# EAGLE board stereo_mix_back (EAGLE 9.4.2), part 1 of 3
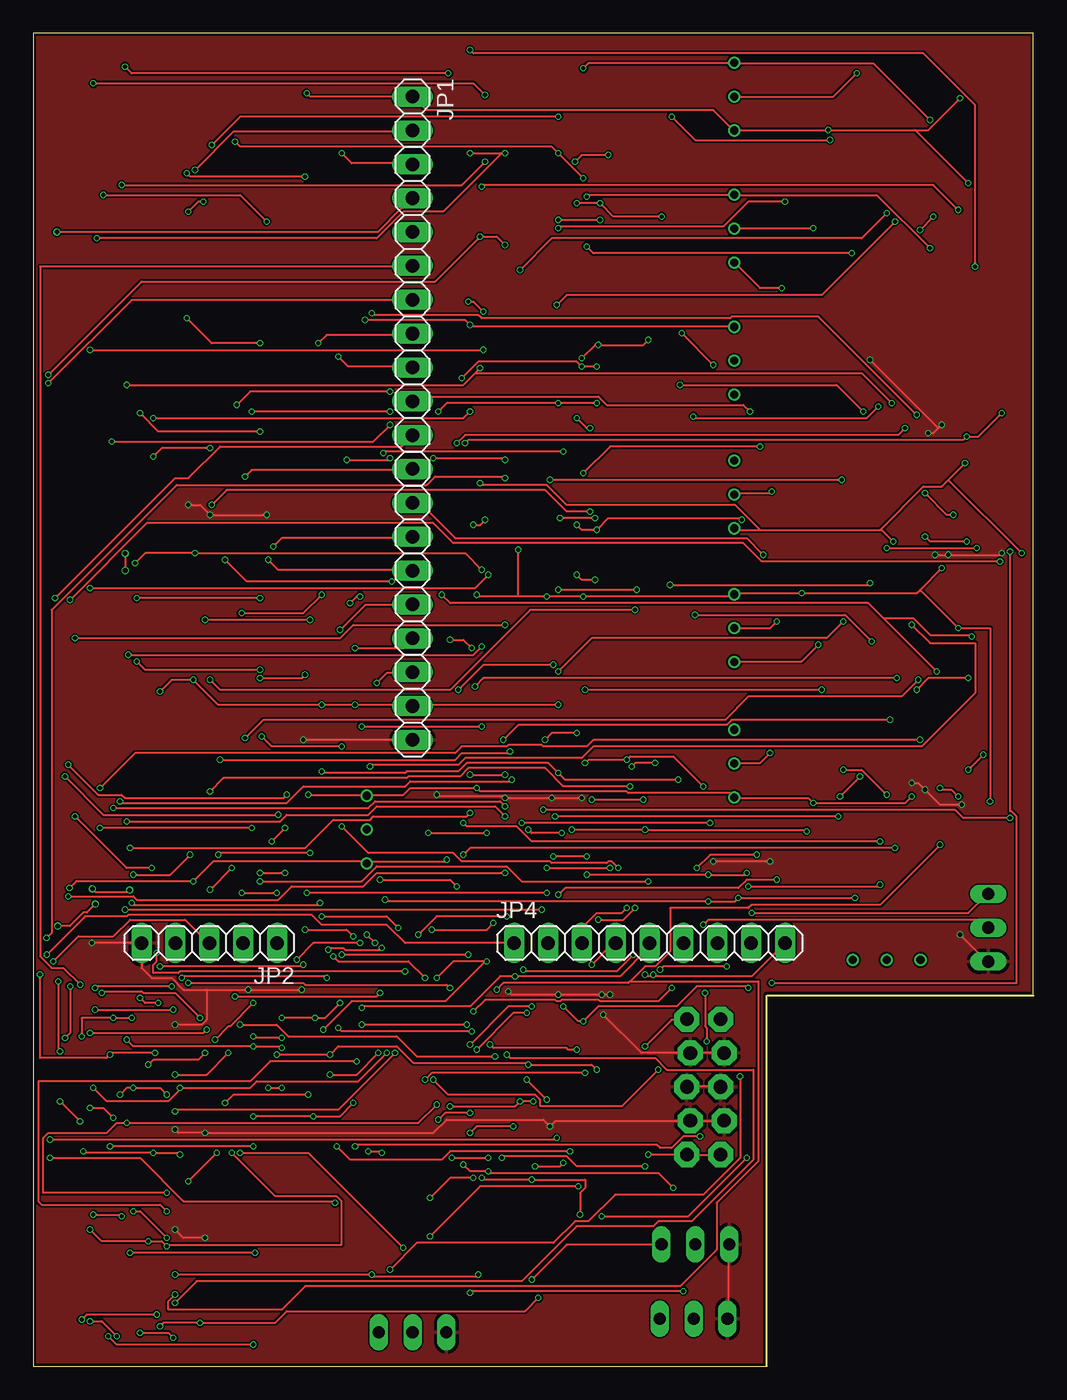
[diagram p0: board, top side]
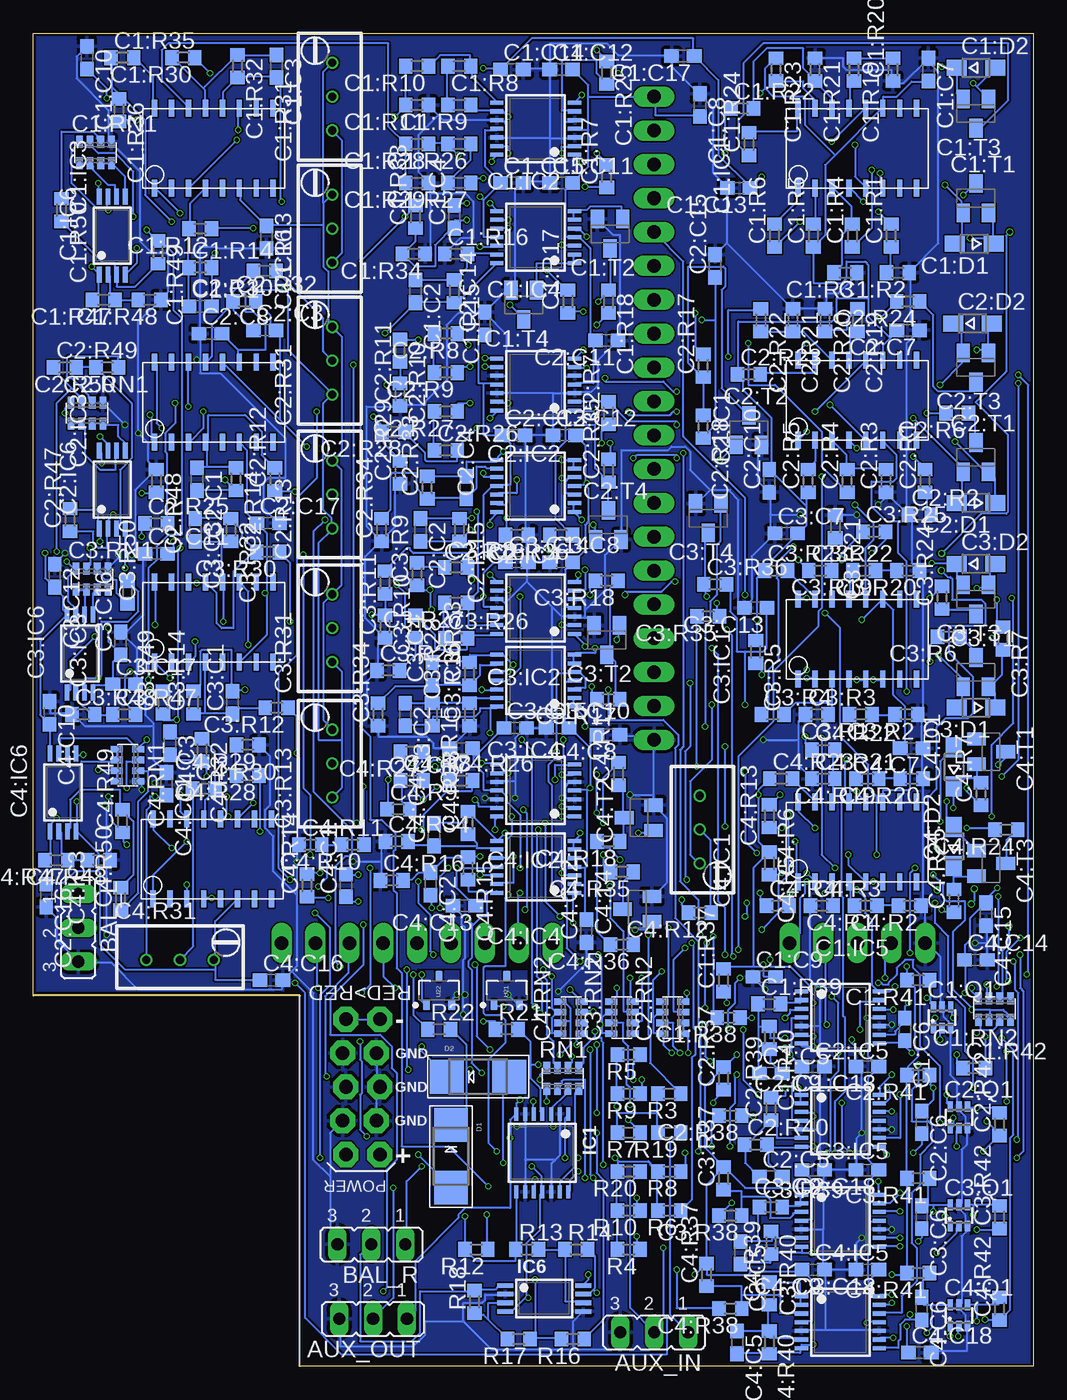
[diagram p1: board, bottom side, seen from below]

Size 75 x 100 mm. Coordinates in mm from the lower left corner, seen from the top.
Outline: 0,0 55.01,0 55.01,27.81 75,27.81 75,100 0,100 0,0
Copper layers (1*16): Top 0.035559375mm / dielectric 1.6mm / Bottom 0.035559375mm
Design rules "jlcpcb2layer *": minimum track width 6mil, minimum drill 12mil, track to track 5mil, track to pad 5mil, pad to pad 5mil, via to via 5mil, smd to smd 5mil, copper to edge 8mil, drill to drill 6mil, minimum pad ring 5mil, minimum via ring 3mil, stop-mask expansion 2.5mil, vias tented up to drill 16mil, thermal gap 10mil

## Footprints (pad centres in the part's own frame; a part is rotated, then mirrored left to right if it is on the bottom)
JP2 = drill 0.914 long: 1 -2.54,0; 2 0,0; 3 2.54,0
C0603 = smd 1.1 x 1: 1 -0.85,0; 2 0.85,0
SOD323-W = smd 1.5 x 1.2: A 1.45,0; C -1.45,0
DMP16 = smd 0.4 x 1.27: P$1 0,0; P$2 1.27,0; P$3 2.54,0; P$4 3.81,0; P$5 5.08,0; P$6 6.35,0; P$7 7.62,0; P$8 8.89,0; P$9 8.89,6; P$10 7.62,6; P$11 6.35,6; P$12 5.08,6; P$13 3.81,6; P$14 2.54,6; P$15 1.27,6; P$16 0,6
TSSOP14 = smd 0.305 x 0.991: 1 -1.95,-2.918; 2 -1.3,-2.918; 3 -0.65,-2.918; 4 0,-2.918; 5 0.65,-2.918; 6 1.3,-2.918; 7 1.95,-2.918; 8 1.95,2.918; 9 1.3,2.918; 10 0.65,2.918; 11 0,2.918; 12 -0.65,2.918; 13 -1.3,2.918; 14 -1.95,2.918
TSSOP8 = smd 0.35 x 1.2: 1 -0.975,-2.925; 2 -0.325,-2.925; 3 0.325,-2.925; 4 0.975,-2.925; 5 0.975,2.925; 6 0.325,2.925; 7 -0.325,2.925; 8 -0.975,2.925
SOT363_PHILIPS = smd 0.4 x 0.8: 1 -0.65,-0.8; 2 0,-0.8; 3 0.65,-0.8; 4 0.65,0.8; 5 0,0.8; 6 -0.65,0.8
R0603 = smd 1 x 1.1: 1 -0.85,0; 2 0.85,0
RTRIMT93YA = drill 0.61: 1 0,-2.54; 2 0,0; 3 0,2.54
CTS742C083 = smd 0.5 x 0.9: 1 -1.2,-0.8; 2 -0.4,-0.8; 3 0.4,-0.8; 4 1.2,-0.8; 5 1.2,0.8; 6 0.4,0.8; 7 -0.4,0.8; 8 -1.2,0.8
SOT23-BEC = smd 1 x 1.4: B -0.95,-1.1; C 0,1.1; E 0.95,-1.1
EURO_PWR_HEADER_LOCK = drill 1.016 pad 1.88 octagon: GND1 -2.54,1.143; GND2 -2.54,-1.397; GND3 0,1.397; GND4 0,-1.143; GND5 2.54,1.143; GND6 2.54,-1.397; NEG1 -5.08,1.397; NEG2 -5.08,-1.143; POS1 5.08,1.397; POS2 5.08,-1.143
SMADIODE = smd 2.54 x 2.54: A 2.349,0; C -2.349,0
1X20 = drill 1.016 long: 1 -24.13,0; 2 -21.59,0; 3 -19.05,0; 4 -16.51,0; 5 -13.97,0; 6 -11.43,0; 7 -8.89,0; 8 -6.35,0; 9 -3.81,0; 10 -1.27,0; 11 1.27,0; 12 3.81,0; 13 6.35,0; 14 8.89,0; 15 11.43,0; 16 13.97,0; 17 16.51,0; 18 19.05,0; 19 21.59,0; 20 24.13,0
1X05 = drill 1.016 long: 1 -5.08,0; 2 -2.54,0; 3 0,0; 4 2.54,0; 5 5.08,0
1X09 = drill 1.016 long: 1 -10.16,0; 2 -7.62,0; 3 -5.08,0; 4 -2.54,0; 5 0,0; 6 2.54,0; 7 5.08,0; 8 7.62,0; 9 10.16,0
TEXAS_INSTRUMENTS_LM4040C5IDBZR_0 = smd 0.8 x 0.55: 1 -1.1,0.95; 2 -1.1,-0.95; 3 1.1,0

## Placement (x,y rotation side)
AUX_IN  [JP2]  28.44,2.54 180 bottom
AUX_OUT  [JP2]  49.52,3.56 180 bottom
BAL_L  [JP2]  71.62,32.89 270 bottom
BAL_R  [JP2]  49.65,9.14 180 bottom
C1:C1  100pF  [C0603]  62.48,79.5 0 bottom
C1:C2  22pF  [C0603]  46.35,80.64 270 bottom
C1:C3  100pF  [C0603]  56.76,97.54 270 bottom
C1:C4  22pF  [C0603]  43.43,86.23 90 bottom
C1:C5  100pF  [C0603]  19.68,21.97 0 bottom
C1:C6  100pF  [C0603]  9.64,25.27 270 bottom
C1:C7  100nF  [C0603]  7.87,97.28 270 bottom
C1:C8  100nF  [C0603]  25.01,94.61 270 bottom
C1:C9  100nF  [C0603]  20.18,29.21 0 bottom
C1:C10  100nF  [C0603]  70.98,98.17 270 bottom
C1:C11  100nF  [C0603]  35.42,88.77 0 bottom
C1:C12  100nF  [C0603]  35.42,97.28 0 bottom
C1:C13  100nF  [C0603]  22.09,88.39 180 bottom
C1:C14  100nF  [C0603]  39.11,97.28 0 bottom
C1:C15  100nF  [C0603]  39.11,88.77 0 bottom
C1:C16  100nF  [C0603]  57.52,84.71 270 bottom
C1:C17  100nF  [C0603]  26.28,98.3 180 bottom
C1:C18  100nF  [C0603]  12.44,22.48 180 bottom
C1:D1  1N4148  [SOD323-W]  4.44,84.2 180 bottom
C1:D2  1N4148  [SOD323-W]  4.31,97.41 0 bottom
C1:IC1  LM13700  [DMP16]  17.64,88.39 0 bottom
C1:IC2  TL084PW  [TSSOP14]  37.33,92.84 90 bottom
C1:IC3  LM13700  [DMP16]  65.91,88.39 0 bottom
C1:IC4  TL084PW  [TSSOP14]  37.33,84.71 90 bottom
C1:IC5  TL084PW  [TSSOP14]  14.47,26.16 270 bottom
C1:IC6  TL082PW  [TSSOP8]  69.08,84.84 0 bottom
C1:Q1  BC847BS  [SOT363_PHILIPS]  6.85,26.16 0 bottom
C1:R1  22  [R0603]  10.66,84.84 90 bottom
C1:R2  470  [R0603]  10.15,82.04 180 bottom
C1:R3  510  [R0603]  14.09,82.04 180 bottom
C1:R4  21k  [R0603]  13.58,84.84 90 bottom
C1:R5  12k  [R0603]  16.5,84.84 90 bottom
C1:R6  7k2  [R0603]  19.42,84.84 90 bottom
C1:R7  6k8  [R0603]  32,89.28 90 bottom
C1:R8  560  [R0603]  43.05,97.54 0 bottom
C1:R9  15k  [R0603]  43.05,94.61 180 bottom
C1:R10  100k  [R0603]  46.22,97.54 180 bottom
C1:R11  680  [R0603]  46.22,94.61 180 bottom
C1:R12  1M  [R0603]  62.48,85.34 180 bottom
C1:R13  100k  [RTRIMT93YA]  52.57,85.34 0 bottom
C1:R14  47k  [R0603]  62.48,82.42 0 bottom
C1:R15  100k  [R0603]  43.43,80.64 270 bottom
C1:R16  68k  [R0603]  43.3,83.44 0 bottom
C1:R17  15k  [R0603]  34.92,79.88 90 bottom
C1:R18  680k  [R0603]  31.87,79.88 270 bottom
C1:R19  22  [R0603]  13.45,97.28 270 bottom
C1:R20  470  [R0603]  10.53,97.28 90 bottom
C1:R21  510  [R0603]  16.38,97.28 270 bottom
C1:R22  21k  [R0603]  21.84,94.36 0 bottom
C1:R23  12k  [R0603]  19.3,97.28 270 bottom
C1:R24  7k2  [R0603]  21.33,91.69 90 bottom
C1:R25  6k8  [R0603]  32,97.03 270 bottom
C1:R26  560  [R0603]  43.05,91.69 180 bottom
C1:R27  15k  [R0603]  43.05,88.77 180 bottom
C1:R28  100k  [R0603]  46.22,91.69 180 bottom
C1:R29  680  [R0603]  46.22,88.77 180 bottom
C1:R30  1M  [R0603]  63.75,98.17 180 bottom
C1:R31  100k  [RTRIMT93YA]  52.57,95.25 0 bottom
C1:R32  47k  [R0603]  59.68,97.54 270 bottom
C1:R33  100k  [R0603]  46.35,86.23 90 bottom
C1:R34  68k  [R0603]  46.47,83.44 180 bottom
C1:R35  15k  [R0603]  68.32,98.17 0 bottom
C1:R36  680k  [R0603]  68.57,94.23 270 bottom
C1:R37  1M  [R0603]  23.23,28.96 90 bottom
C1:R38  1k  [R0603]  22.85,26.16 180 bottom
C1:R39  1M  [R0603]  19.8,27.18 0 bottom
C1:R40  10k  [R0603]  19.8,24.64 270 bottom
C1:R41  10M  [R0603]  8.63,28.96 180 bottom
C1:R42  1k5  [R0603]  4.44,22.35 0 bottom
C1:R47  200k  [R0603]  69.72,80.01 180 bottom
C1:R48  200k  [R0603]  66.29,80.01 180 bottom
C1:R49  100k  [R0603]  65.65,83.57 270 bottom
C1:R50  100k  [R0603]  72.89,86.74 270 bottom
C1:RN1  CTS742C083  [CTS742C083]  70.35,91.06 0 bottom
C1:RN2  CTS742C083  [CTS742C083]  2.91,26.8 180 bottom
C1:T1  3906  [SOT23-BEC]  4.31,87.63 0 bottom
C1:T2  3906  [SOT23-BEC]  31.74,84.96 180 bottom
C1:T3  3906  [SOT23-BEC]  4.31,93.98 180 bottom
C1:T4  3906  [SOT23-BEC]  38.22,79.63 180 bottom
C2:C1  100pF  [C0603]  62.73,66.55 270 bottom
C2:C2  22pF  [C0603]  45.97,62.74 270 bottom
C2:C3  100pF  [C0603]  57.65,77.72 0 bottom
C2:C4  22pF  [C0603]  42.54,65.91 90 bottom
C2:C5  100pF  [C0603]  19.68,14.22 0 bottom
C2:C6  100pF  [C0603]  8.37,18.29 270 bottom
C2:C7  100nF  [C0603]  9.39,77.72 180 bottom
C2:C8  100nF  [C0603]  61.71,77.47 0 bottom
C2:C9  100nF  [C0603]  16.5,22.48 180 bottom
C2:C10  100nF  [C0603]  19.8,66.42 90 bottom
C2:C11  100nF  [C0603]  32,76.96 180 bottom
C2:C12  100nF  [C0603]  35.17,69.85 0 bottom
C2:C13  100nF  [C0603]  38.98,69.85 0 bottom
C2:C14  100nF  [C0603]  41.14,78.23 90 bottom
C2:C15  100nF  [C0603]  23.87,82.55 90 bottom
C2:C16  100nF  [C0603]  74.03,35.31 270 bottom
C2:C17  100nF  [C0603]  57.4,63.25 0 bottom
C2:C18  100nF  [C0603]  12.44,14.73 180 bottom
C2:D1  1N4148  [SOD323-W]  4.31,64.77 180 bottom
C2:D2  1N4148  [SOD323-W]  4.56,78.23 0 bottom
C2:IC1  LM13700  [DMP16]  17.64,69.47 0 bottom
C2:IC2  TL084PW  [TSSOP14]  37.33,73.66 90 bottom
C2:IC3  LM13700  [DMP16]  65.91,69.34 0 bottom
C2:IC4  TL084PW  [TSSOP14]  37.33,66.04 90 bottom
C2:IC5  TL084PW  [TSSOP14]  14.47,18.41 270 bottom
C2:IC6  TL082PW  [TSSOP8]  69.08,65.79 0 bottom
C2:Q1  BC847BS  [SOT363_PHILIPS]  5.58,18.67 0 bottom
C2:R1  22  [R0603]  8.12,66.42 90 bottom
C2:R2  470  [R0603]  8.5,63.88 0 bottom
C2:R3  510  [R0603]  11.04,66.42 90 bottom
C2:R4  21k  [R0603]  13.96,66.42 90 bottom
C2:R5  12k  [R0603]  16.88,66.42 90 bottom
C2:R6  7k2  [R0603]  5.71,71.5 180 bottom
C2:R7  6k8  [R0603]  31.87,71.5 90 bottom
C2:R8  560  [R0603]  44.06,77.47 0 bottom
C2:R9  15k  [R0603]  44.06,74.55 180 bottom
C2:R10  100k  [R0603]  47.49,76.2 270 bottom
C2:R11  680  [R0603]  47.49,72.9 90 bottom
C2:R12  1M  [R0603]  56.89,66.55 90 bottom
C2:R13  100k  [RTRIMT93YA]  52.57,65.41 0 bottom
C2:R14  47k  [R0603]  59.81,66.55 270 bottom
C2:R15  100k  [R0603]  43.05,62.74 270 bottom
C2:R16  68k  [R0603]  38.73,62.36 180 bottom
C2:R17  15k  [R0603]  24.76,75.06 90 bottom
C2:R18  680k  [R0603]  24.76,70.48 270 bottom
C2:R19  22  [R0603]  13.2,78.49 270 bottom
C2:R20  470  [R0603]  15.61,78.49 270 bottom
C2:R21  510  [R0603]  18.03,78.49 270 bottom
C2:R22  21k  [R0603]  20.44,78.49 270 bottom
C2:R23  12k  [R0603]  21.33,74.42 0 bottom
C2:R24  7k2  [R0603]  9.39,79.88 180 bottom
C2:R25  6k8  [R0603]  65.78,63.25 0 bottom
C2:R26  560  [R0603]  44.06,68.71 0 bottom
C2:R27  15k  [R0603]  44.06,71.63 180 bottom
C2:R28  100k  [R0603]  48,70.1 180 bottom
C2:R29  680  [R0603]  47.49,67.06 90 bottom
C2:R30  1M  [R0603]  57.65,82.17 180 bottom
C2:R31  100k  [RTRIMT93YA]  52.57,75.44 0 bottom
C2:R32  47k  [R0603]  59.17,79.88 0 bottom
C2:R33  100k  [R0603]  45.46,65.91 90 bottom
C2:R34  68k  [R0603]  48.89,62.74 90 bottom
C2:R35  15k  [R0603]  31.87,67.18 90 bottom
C2:R36  680k  [R0603]  35.42,62.36 180 bottom
C2:R37  1M  [R0603]  23.23,21.59 90 bottom
C2:R38  1k  [R0603]  22.73,18.8 180 bottom
C2:R39  1M  [R0603]  19.68,19.3 90 bottom
C2:R40  10k  [R0603]  20.82,16.64 0 bottom
C2:R41  10M  [R0603]  8.63,21.84 180 bottom
C2:R42  1k5  [R0603]  2.53,18.16 90 bottom
C2:R47  200k  [R0603]  72.25,63.5 90 bottom
C2:R48  200k  [R0603]  65.78,66.42 270 bottom
C2:R49  100k  [R0603]  72.64,74.93 0 bottom
C2:R50  100k  [R0603]  69.46,74.93 180 bottom
C2:RN1  CTS742C083  [CTS742C083]  70.98,71.5 0 bottom
C2:RN2  CTS742C083  [CTS742C083]  27.04,26.16 90 bottom
C2:T1  3906  [SOT23-BEC]  4.31,68.2 0 bottom
C2:T2  3906  [SOT23-BEC]  21.33,70.23 0 bottom
C2:T3  3906  [SOT23-BEC]  4.31,74.93 180 bottom
C2:T4  3906  [SOT23-BEC]  31.87,63.12 0 bottom
C3:C1  100pF  [C0603]  60.06,49.78 90 bottom
C3:C2  22pF  [C0603]  47.11,48.9 270 bottom
C3:C3  100pF  [C0603]  62.86,62.74 270 bottom
C3:C4  22pF  [C0603]  45.08,51.94 90 bottom
C3:C5  100pF  [C0603]  21.96,8.51 270 bottom
C3:C6  100pF  [C0603]  8.37,11.18 270 bottom
C3:C7  100nF  [C0603]  18.53,62.48 0 bottom
C3:C8  100nF  [C0603]  35.42,60.33 0 bottom
C3:C9  100nF  [C0603]  16.5,14.73 180 bottom
C3:C10  100nF  [C0603]  35.68,47.88 0 bottom
C3:C11  100nF  [C0603]  65.78,60.96 0 bottom
C3:C12  100nF  [C0603]  73.4,59.31 270 bottom
C3:C13  100nF  [C0603]  20.82,56.9 180 bottom
C3:C14  100nF  [C0603]  38.73,60.33 0 bottom
C3:C15  100nF  [C0603]  38.85,47.88 0 bottom
C3:C16  100nF  [C0603]  68.44,54.23 90 bottom
C3:C17  100nF  [C0603]  68.19,51.18 0 bottom
C3:C18  100nF  [C0603]  12.44,7.24 180 bottom
C3:D1  1N4148  [SOD323-W]  4.31,49.4 180 bottom
C3:D2  1N4148  [SOD323-W]  4.31,60.2 0 bottom
C3:IC1  LM13700  [DMP16]  17.64,51.56 0 bottom
C3:IC2  TL084PW  [TSSOP14]  37.33,56.9 90 bottom
C3:IC3  LM13700  [DMP16]  65.91,52.83 0 bottom
C3:IC4  TL084PW  [TSSOP14]  37.33,51.44 90 bottom
C3:IC5  TL084PW  [TSSOP14]  14.47,10.92 270 bottom
C3:IC6  TL082PW  [TSSOP8]  71.49,53.47 0 bottom
C3:Q1  BC847BS  [SOT363_PHILIPS]  5.58,11.3 0 bottom
C3:R1  22  [R0603]  12.95,48.9 180 bottom
C3:R2  470  [R0603]  9.52,48.9 180 bottom
C3:R3  510  [R0603]  16.25,48.9 0 bottom
C3:R4  21k  [R0603]  19.55,48.9 0 bottom
C3:R5  12k  [R0603]  20.82,53.59 270 bottom
C3:R6  7k2  [R0603]  6.34,54.74 180 bottom
C3:R7  6k8  [R0603]  2.28,54.61 270 bottom
C3:R8  560  [R0603]  43.3,59.94 0 bottom
C3:R9  15k  [R0603]  46.22,59.44 90 bottom
C3:R10  100k  [R0603]  48.63,58.8 270 bottom
C3:R11  680  [R0603]  48.63,55.5 90 bottom
C3:R12  1M  [R0603]  56.76,49.4 180 bottom
C3:R13  100k  [RTRIMT93YA]  52.57,45.21 0 bottom
C3:R14  47k  [R0603]  62.98,49.78 90 bottom
C3:R15  100k  [R0603]  45.08,48.9 270 bottom
C3:R16  68k  [R0603]  42.28,48.9 90 bottom
C3:R17  15k  [R0603]  31.87,50.04 180 bottom
C3:R18  680k  [R0603]  32,58.93 180 bottom
C3:R19  22  [R0603]  12.69,59.69 180 bottom
C3:R20  470  [R0603]  9.39,59.69 180 bottom
C3:R21  510  [R0603]  14.85,62.99 270 bottom
C3:R22  21k  [R0603]  15.99,59.69 0 bottom
C3:R23  12k  [R0603]  19.3,59.69 0 bottom
C3:R24  7k2  [R0603]  6.85,57.66 90 bottom
C3:R25  6k8  [R0603]  11.93,62.61 0 bottom
C3:R26  560  [R0603]  43.3,54.61 0 bottom
C3:R27  15k  [R0603]  43.3,57.28 180 bottom
C3:R28  100k  [R0603]  46.35,55.5 270 bottom
C3:R29  680  [R0603]  48.38,52.2 0 bottom
C3:R30  1M  [R0603]  57.4,61.09 180 bottom
C3:R31  100k  [RTRIMT93YA]  52.57,55.37 0 bottom
C3:R32  47k  [R0603]  60.19,62.74 270 bottom
C3:R33  100k  [R0603]  42.28,51.94 90 bottom
C3:R34  68k  [R0603]  49.14,48.9 90 bottom
C3:R35  15k  [R0603]  24.38,56.26 180 bottom
C3:R36  680k  [R0603]  23.87,58.67 0 bottom
C3:R37  1M  [R0603]  23.23,14.1 90 bottom
C3:R38  1k  [R0603]  22.73,11.3 180 bottom
C3:R39  1M  [R0603]  19.68,11.94 0 bottom
C3:R40  10k  [R0603]  19.68,9.27 270 bottom
C3:R41  10M  [R0603]  8.63,14.1 180 bottom
C3:R42  1k5  [R0603]  2.53,11.18 90 bottom
C3:R47  200k  [R0603]  68.19,48.9 0 bottom
C3:R48  200k  [R0603]  71.24,48.9 0 bottom
C3:R49  100k  [R0603]  65.27,49.78 90 bottom
C3:R50  100k  [R0603]  67.94,58.04 90 bottom
C3:RN1  CTS742C083  [CTS742C083]  70.6,59.05 0 bottom
C3:RN2  CTS742C083  [CTS742C083]  30.85,26.16 90 bottom
C3:T1  3906  [SOT23-BEC]  4.31,52.07 0 bottom
C3:T2  3906  [SOT23-BEC]  32,54.48 180 bottom
C3:T3  3906  [SOT23-BEC]  4.31,57.53 180 bottom
C3:T4  3906  [SOT23-BEC]  24.38,63.63 180 bottom
C4:C1  100pF  [C0603]  51.55,36.07 90 bottom
C4:C2  22pF  [C0603]  45.2,36.2 270 bottom
C4:C3  100pF  [C0603]  64.76,46.74 270 bottom
C4:C4  22pF  [C0603]  44.95,39.88 90 bottom
C4:C5  100pF  [C0603]  22.22,1.78 270 bottom
C4:C6  100pF  [C0603]  8.37,4.32 270 bottom
C4:C7  100nF  [C0603]  9.14,46.35 180 bottom
C4:C8  100nF  [C0603]  31.87,47.37 180 bottom
C4:C9  100nF  [C0603]  16.5,7.24 180 bottom
C4:C10  100nF  [C0603]  73.78,49.02 270 bottom
C4:C11  100nF  [C0603]  65.02,43.69 270 bottom
C4:C12  100nF  [C0603]  33.52,32.64 90 bottom
C4:C13  100nF  [C0603]  42.66,34.54 180 bottom
C4:C14  100nF  [C0603]  4.31,30.48 0 bottom
C4:C15  100nF  [C0603]  3.55,33.91 270 bottom
C4:C16  100nF  [C0603]  57.14,28.96 0 bottom
C4:C17  100nF  [C0603]  42.92,46.35 180 bottom
C4:C18  100nF  [C0603]  8.5,1.02 0 bottom
C4:D1  1N4148  [SOD323-W]  5.96,44.96 90 bottom
C4:D2  1N4148  [SOD323-W]  5.96,38.99 90 bottom
C4:IC1  LM13700  [DMP16]  17.64,36.32 0 bottom
C4:IC2  TL084PW  [TSSOP14]  37.33,43.18 90 bottom
C4:IC3  LM13700  [DMP16]  66.03,35.05 0 bottom
C4:IC4  TL084PW  [TSSOP14]  37.33,37.47 90 bottom
C4:IC5  TL084PW  [TSSOP14]  14.47,3.3 270 bottom
C4:IC6  TL082PW  [TSSOP8]  72.76,43.05 0 bottom
C4:Q1  BC847BS  [SOT363_PHILIPS]  5.58,3.81 0 bottom
C4:R1  22  [R0603]  12.56,34.54 180 bottom
C4:R2  470  [R0603]  9.26,34.54 180 bottom
C4:R3  510  [R0603]  15.87,34.54 0 bottom
C4:R4  21k  [R0603]  19.17,34.54 0 bottom
C4:R5  12k  [R0603]  19.8,37.72 270 bottom
C4:R6  7k2  [R0603]  19.8,41.27 270 bottom
C4:R7  6k8  [R0603]  3.93,42.93 90 bottom
C4:R8  560  [R0603]  46.6,43.94 0 bottom
C4:R9  15k  [R0603]  47.62,41.78 0 bottom
C4:R10  100k  [R0603]  51.05,39.12 180 bottom
C4:R11  680  [R0603]  54.22,39.12 0 bottom
C4:R12  1M  [R0603]  25.01,34.04 180 bottom
C4:R13  100k  [RTRIMT93YA]  25.01,40.26 180 bottom
C4:R14  47k  [R0603]  54.48,36.07 90 bottom
C4:R15  100k  [R0603]  42.41,37.34 270 bottom
C4:R16  68k  [R0603]  48.12,36.45 0 bottom
C4:R17  15k  [R0603]  31.11,44.45 90 bottom
C4:R18  680k  [R0603]  31.87,39.37 180 bottom
C4:R19  22  [R0603]  12.44,44.07 180 bottom
C4:R20  470  [R0603]  9.14,44.07 180 bottom
C4:R21  510  [R0603]  15.74,44.07 0 bottom
C4:R22  21k  [R0603]  15.74,46.23 0 bottom
C4:R23  12k  [R0603]  18.91,44.07 0 bottom
C4:R24  7k2  [R0603]  2.02,40.26 180 bottom
C4:R25  6k8  [R0603]  5.96,34.92 90 bottom
C4:R26  560  [R0603]  42.92,43.94 0 bottom
C4:R27  15k  [R0603]  46.6,46.1 180 bottom
C4:R28  100k  [R0603]  58.92,44.32 180 bottom
C4:R29  680  [R0603]  58.92,46.61 180 bottom
C4:R30  1M  [R0603]  62.22,43.31 0 bottom
C4:R31  100k  [RTRIMT93YA]  64,30.48 270 bottom
C4:R32  47k  [R0603]  62.35,46.23 270 bottom
C4:R33  100k  [R0603]  42.41,40.77 90 bottom
C4:R34  68k  [R0603]  47.74,39.37 0 bottom
C4:R35  15k  [R0603]  30.85,37.08 180 bottom
C4:R36  680k  [R0603]  30.85,31.62 180 bottom
C4:R37  1M  [R0603]  24.5,6.86 90 bottom
C4:R38  1k  [R0603]  22.73,4.32 180 bottom
C4:R39  1M  [R0603]  19.8,5.46 90 bottom
C4:R40  10k  [R0603]  19.8,1.78 270 bottom
C4:R41  10M  [R0603]  8.63,6.99 180 bottom
C4:R42  1k5  [R0603]  2.53,4.32 90 bottom
C4:R47  200k  [R0603]  73.27,37.97 180 bottom
C4:R48  200k  [R0603]  70.1,37.97 180 bottom
C4:R49  100k  [R0603]  68.32,40.89 90 bottom
C4:R50  100k  [R0603]  68.44,35.05 90 bottom
C4:RN1  CTS742C083  [CTS742C083]  67.94,45.09 270 bottom
C4:RN2  CTS742C083  [CTS742C083]  34.66,26.16 90 bottom
C4:T1  3906  [SOT23-BEC]  3.17,46.1 270 bottom
C4:T2  3906  [SOT23-BEC]  29.58,41.15 90 bottom
C4:T3  3906  [SOT23-BEC]  3.17,37.72 270 bottom
C4:T4  3906  [SOT23-BEC]  29.71,34.29 90 bottom
C5  EURO_POWER_LOCKFAT-LOCK  [EURO_PWR_HEADER_LOCK]  50.41,20.95 270 bottom
D1  1N4001  [SMADIODE]  43.68,15.75 270 bottom
D2  1N4001  [SMADIODE]  41.65,21.72 0 bottom
IC1  TL084PW  [TSSOP14]  36.82,16 180 bottom
IC6  TL082PW  [TSSOP8]  36.7,5.08 270 bottom
JP1  [1X20]  28.44,71.12 270 top
JP2  [1X05]  13.2,31.75 180 top
JP4  [1X09]  46.22,31.75 0 top
R3  100k  [R0603]  27.3,20.45 180 bottom
R4  100k  [R0603]  30.34,8.76 180 bottom
R5  100k  [R0603]  30.34,23.37 180 bottom
R6  100k  [R0603]  27.3,11.68 180 bottom
R7  100k  [R0603]  30.34,17.53 180 bottom
R8  100k  [R0603]  27.3,14.61 180 bottom
R9  100k  [R0603]  30.34,20.45 180 bottom
R10  100k  [R0603]  30.34,11.68 180 bottom
R12  24k  [R0603]  41.77,8.76 180 bottom
R13  100k  [R0603]  37.97,8.76 0 bottom
R14  100k  [R0603]  34.28,8.76 0 bottom
R16  24k  [R0603]  34.54,2.03 180 bottom
R17  100k  [R0603]  38.6,2.03 180 bottom
R18  100k  [R0603]  41.9,4.83 90 bottom
R19  100k  [R0603]  27.3,17.53 180 bottom
R20  100k  [R0603]  30.34,14.61 180 bottom
R21  [R0603]  39.49,25.27 0 bottom
R22  680R  [R0603]  44.57,25.27 0 bottom
RN1  CTS742C083  [CTS742C083]  35.3,21.59 0 bottom
U21  TEXAS_INSTRUMENTS_LM4040C5IDBZR  [TEXAS_INSTRUMENTS_LM4040C5IDBZR_0]  39.49,28.19 90 bottom
U22  TEXAS_INSTRUMENTS_LM4040C10IDBZR  [TEXAS_INSTRUMENTS_LM4040C5IDBZR_0]  44.57,28.19 90 bottom

## Library data of the parts
AUX_IN AUX_OUT BAL_L BAL_R = jumper
C1:C1-C1:C18 C2:C1-C2:C18 C3:C1-C3:C18 C4:C1-C4:C18 = rcl; SPICEPREFIX: C
C1:D1 C1:D2 C2:D1 C2:D2 C3:D1 C3:D2 C4:D1 C4:D2 = diode
C1:IC1 C1:IC3 C2:IC1 C2:IC3 C3:IC1 C3:IC3 C4:IC1 C4:IC3 = ota
C1:IC2 C1:IC4-C1:IC6 C2:IC2 C2:IC4-C2:IC6 C3:IC2 C3:IC4-C3:IC6 C4:IC2 C4:IC4-C4:IC6 IC1 IC6 = op-amp
C1:Q1 C2:Q1 C3:Q1 C4:Q1 = transistor-small-signal
C1:R1-C1:R12 C1:R14-C1:R30 C1:R32-C1:R42 C1:R47-C1:R50 C2:R1-C2:R12 C2:R14-C2:R30 C2:R32-C2:R42 C2:R47-C2:R50 C3:R1-C3:R12 C3:R14-C3:R30 C3:R32-C3:R42 C3:R47-C3:R50 C4:R1-C4:R12 C4:R14-C4:R30 C4:R32-C4:R42 C4:R47-C4:R50 R3-R10 R12-R14 R16-R22 = rcl; SPICEPREFIX: R
C1:R13 C1:R31 C2:R13 C2:R31 C3:R13 C3:R31 C4:R13 C4:R31 = rcl; SPICEMODEL: X; SPICEPREFIXL: POT
C1:RN1 C1:RN2 C2:RN1 C2:RN2 C3:RN1 C3:RN2 C4:RN1 C4:RN2 RN1 = resistor-net; OC_FARNELL: unknown; OC_NEWARK: unknown
C1:T1-C1:T4 C2:T1-C2:T4 C3:T1-C3:T4 C4:T1-C4:T4 = transistor-neu-to92
C5 = MusicThingModular
D1 D2 = adafruit
JP1 JP2 JP4 = pinhead
U21 U22 = lm4040

## Nets
1_IN_L: C1:R4.1 JP1.2
1_IN_R: C1:R22.1 JP1.3
1_PAN_ATT_R: C1:RN2.3 JP1.6
1_PAN_ATT_W: C1:IC5.12 C1:RN2.6 C1:RN2.8 JP1.5
1_PAN_CV_IN: C1:RN2.1 C1:RN2.2 JP1.4
1_VOLUME_CV: C1:R38.2 JP1.7
2_IN_L: C2:R4.1 JP1.8
2_IN_R: C2:R22.1 JP1.9
2_PAN_ATT_R: C2:RN2.3 JP1.12
2_PAN_ATT_W: C2:IC5.12 C2:RN2.6 C2:RN2.8 JP1.11
2_PAN_CV_IN: C2:RN2.1 C2:RN2.2 JP1.10
2_VOLUME_CV: C2:R38.2 JP1.13
3_IN_L: C3:R4.1 JP1.14
3_IN_R: C3:R22.1 JP1.15
3_PAN_ATT_R: C3:RN2.3 JP1.18
3_PAN_ATT_W: C3:IC5.12 C3:RN2.6 C3:RN2.8 JP1.17
3_PAN_CV_IN: C3:RN2.1 C3:RN2.2 JP1.16
3_VOLUME_CV: C3:R38.2 JP4.1
4_IN_L: C4:R4.1 JP4.2
4_IN_R: C4:R22.1 JP4.3
4_PAN_ATT_R: C4:RN2.3 JP4.6
4_PAN_ATT_W: C4:IC5.12 C4:RN2.6 C4:RN2.8 JP4.5
4_PAN_CV_IN: C4:RN2.1 C4:RN2.2 JP4.4
4_VOLUME_CV: C4:R38.2 JP4.7
+12V: C1:C7.2 C1:C8.2 C1:C9.2 C1:C10.2 C1:C11.2 C1:C12.2 C1:IC1.P$11 C1:IC2.4 C1:IC3.P$11 C1:IC4.4 C1:IC5.4 C1:IC6.8 C1:R5.1 C1:R13.1 C1:R23.1 C1:R31.1 C1:R37.2 C1:R41.2 C2:C7.2 C2:C8.2 C2:C9.2 C2:C10.2 C2:C11.2 C2:C12.2 C2:IC1.P$11 C2:IC2.4 C2:IC3.P$11 C2:IC4.4 C2:IC5.4 C2:IC6.8 C2:R5.1 C2:R13.1 C2:R23.1 C2:R31.1 C2:R37.2 C2:R41.2 C3:C7.2 C3:C8.2 C3:C9.2 C3:C10.2 C3:C11.2 C3:C12.2 C3:IC1.P$11 C3:IC2.4 C3:IC3.P$11 C3:IC4.4 C3:IC5.4 C3:IC6.8 C3:R5.1 C3:R13.1 C3:R23.1 C3:R31.1 C3:R37.2 C3:R41.2 C4:C7.2 C4:C8.2 C4:C9.2 C4:C10.2 C4:C11.2 C4:C12.2 C4:IC1.P$11 C4:IC2.4 C4:IC3.P$11 C4:IC4.4 C4:IC5.4 C4:IC6.8 C4:R5.1 C4:R13.1 C4:R23.1 C4:R31.1 C4:R37.2 C4:R41.2 D1.C IC1.4 IC6.8 JP1.1 R21.2 R22.2
-12V: C1:C13.1 C1:C14.1 C1:C15.1 C1:C16.1 C1:C17.1 C1:C18.1 C1:IC1.P$6 C1:IC2.11 C1:IC3.P$6 C1:IC4.11 C1:IC5.11 C1:IC6.4 C1:R13.3 C1:R18.2 C1:R31.3 C1:R36.2 C2:C13.1 C2:C14.1 C2:C15.1 C2:C16.1 C2:C17.1 C2:C18.1 C2:IC1.P$6 C2:IC2.11 C2:IC3.P$6 C2:IC4.11 C2:IC5.11 C2:IC6.4 C2:R13.3 C2:R18.2 C2:R31.3 C2:R36.2 C3:C13.1 C3:C14.1 C3:C15.1 C3:C16.1 C3:C17.1 C3:C18.1 C3:IC1.P$6 C3:IC2.11 C3:IC3.P$6 C3:IC4.11 C3:IC5.11 C3:IC6.4 C3:R13.3 C3:R18.2 C3:R31.3 C3:R36.2 C4:C13.1 C4:C14.1 C4:C15.1 C4:C16.1 C4:C17.1 C4:C18.1 C4:IC1.P$6 C4:IC2.11 C4:IC3.P$6 C4:IC4.11 C4:IC5.11 C4:IC6.4 C4:R13.3 C4:R18.2 C4:R31.3 C4:R36.2 D2.A IC1.11 IC6.4 JP1.19
AUX_IN_L: AUX_IN.1 R19.1
AUX_IN_R: AUX_IN.2 R20.1
BAL_N_L: BAL_L.2 IC6.7 R14.2
BAL_N_R: BAL_R.2 IC6.1 R18.2
BAL_P_L: BAL_L.1 IC1.8 R12.2 R13.1
BAL_P_R: BAL_R.1 IC1.1 R16.2 R17.1
BYPASS_L: AUX_OUT.1 IC1.7 JP2.3 RN1.8
BYPASS_R: AUX_OUT.2 IC1.14 JP2.4 RN1.5
C1:N$1: C1:IC1.P$4 C1:R1.2
C1:N$2: C1:R1.1 C1:R2.2
C1:N$3: C1:IC1.P$3 C1:R3.2 C1:R4.2
C1:N$4: C1:IC1.P$1 C1:R6.2
C1:N$5: C1:IC1.P$2 C1:R5.2
C1:N$6: C1:R6.1 C1:T1.C
C1:N$7: C1:D1.A C1:IC2.1 C1:T1.B
C1:N$8: C1:D1.C C1:IC2.2 C1:R7.2 C1:T1.E
C1:N$9: C1:IC1.P$5 C1:IC2.9 C1:R9.1
C1:N$10: C1:R8.1 C1:R9.2
C1:N$11: C1:IC2.8 C1:R8.2 C1:R10.1
C1:N$12: C1:C1.1 C1:IC3.P$4 C1:R12.2 C1:R14.1
C1:N$13: C1:IC3.P$3 C1:R10.2 C1:R11.2
C1:N$14: C1:R12.1 C1:R13.2
C1:N$15: C1:C2.1 C1:IC4.13 C1:R15.1 C1:R16.2
C1:N$16: C1:C1.2 C1:IC4.12 C1:R14.2
C1:N$17: C1:IC3.P$1 C1:R17.2
C1:N$18: C1:R17.1 C1:R18.1 C1:T2.C
C1:N$19: C1:IC4.6 C1:IC4.7 C1:T2.B
C1:N$20: C1:IC1.P$13 C1:R19.2
C1:N$21: C1:R19.1 C1:R20.2
C1:N$22: C1:IC1.P$14 C1:R21.2 C1:R22.2
C1:N$23: C1:IC1.P$15 C1:R23.2
C1:N$24: C1:IC1.P$16 C1:R24.2
C1:N$25: C1:R24.1 C1:T3.C
C1:N$26: C1:D2.A C1:IC2.7 C1:T3.B
C1:N$27: C1:D2.C C1:IC2.6 C1:R25.2 C1:T3.E
C1:N$28: C1:IC1.P$12 C1:IC2.13 C1:R27.1
C1:N$29: C1:R26.1 C1:R27.2
C1:N$30: C1:IC2.14 C1:R26.2 C1:R28.1
C1:N$31: C1:IC3.P$14 C1:R28.2 C1:R29.2
C1:N$32: C1:C3.1 C1:IC3.P$13 C1:R30.2 C1:R32.1
C1:N$33: C1:R30.1 C1:R31.2
C1:N$34: C1:C3.2 C1:IC3.P$12 C1:IC4.10 C1:R32.2
C1:N$35: C1:C4.1 C1:IC4.9 C1:R33.1 C1:R34.2
C1:N$36: C1:IC3.P$16 C1:R35.2
C1:N$37: C1:R35.1 C1:R36.1 C1:T4.C
C1:N$38: C1:IC4.1 C1:IC4.2 C1:T4.B
C1:N$39: C1:IC5.1 C1:IC5.2 C1:R39.2
C1:N$40: C1:IC5.3 C1:R37.1 C1:R38.1
C1:N$41: C1:C5.1 C1:IC5.6 C1:R39.1 C1:R40.1
C1:N$42: C1:C5.2 C1:IC5.7 C1:Q1.2 C1:R40.2
C1:N$43: C1:IC6.5 C1:RN1.3 C1:RN1.4
C1:N$44: C1:C6.1 C1:IC5.9 C1:Q1.6 C1:R41.1
C1:N$45: C1:IC6.6 C1:RN1.1 C1:RN1.2
C1:N$46: C1:Q1.1 C1:Q1.4 C1:R42.2
C1:N$47: C1:IC6.2 C1:R47.1 C1:R48.2
C1:N$48: C1:IC5.13 C1:RN2.5 C1:RN2.7
C1:N$50: C1:IC6.3 C1:R49.2 C1:R50.2
C1:PAN_CV: C1:IC5.14 C1:R49.1 C1:RN1.7 C1:RN2.4
C1:PAN_CV_L: C1:IC6.7 C1:R7.1 C1:RN1.8
C1:PAN_CV_R: C1:IC6.1 C1:R25.1 C1:R47.2
C1:REF_5: C1:R50.1 C1:RN1.6
C1:VOLUME_CV_LOG: C1:C6.2 C1:IC4.3 C1:IC4.5 C1:IC5.8 C1:R42.1
C2:N$1: C2:IC1.P$4 C2:R1.2
C2:N$2: C2:R1.1 C2:R2.2
C2:N$3: C2:IC1.P$3 C2:R3.2 C2:R4.2
C2:N$4: C2:IC1.P$1 C2:R6.2
C2:N$5: C2:IC1.P$2 C2:R5.2
C2:N$6: C2:R6.1 C2:T1.C
C2:N$7: C2:D1.A C2:IC2.1 C2:T1.B
C2:N$8: C2:D1.C C2:IC2.2 C2:R7.2 C2:T1.E
C2:N$9: C2:IC1.P$5 C2:IC2.9 C2:R9.1
C2:N$10: C2:R8.1 C2:R9.2
C2:N$11: C2:IC2.8 C2:R8.2 C2:R10.1
C2:N$12: C2:C1.1 C2:IC3.P$4 C2:R12.2 C2:R14.1
C2:N$13: C2:IC3.P$3 C2:R10.2 C2:R11.2
C2:N$14: C2:R12.1 C2:R13.2
C2:N$15: C2:C2.1 C2:IC4.13 C2:R15.1 C2:R16.2
C2:N$16: C2:C1.2 C2:IC4.12 C2:R14.2
C2:N$17: C2:IC3.P$1 C2:R17.2
C2:N$18: C2:R17.1 C2:R18.1 C2:T2.C
C2:N$19: C2:IC4.6 C2:IC4.7 C2:T2.B
C2:N$20: C2:IC1.P$13 C2:R19.2
C2:N$21: C2:R19.1 C2:R20.2
C2:N$22: C2:IC1.P$14 C2:R21.2 C2:R22.2
C2:N$23: C2:IC1.P$15 C2:R23.2
C2:N$24: C2:IC1.P$16 C2:R24.2
C2:N$25: C2:R24.1 C2:T3.C
C2:N$26: C2:D2.A C2:IC2.7 C2:T3.B
C2:N$27: C2:D2.C C2:IC2.6 C2:R25.2 C2:T3.E
C2:N$28: C2:IC1.P$12 C2:IC2.13 C2:R27.1
C2:N$29: C2:R26.1 C2:R27.2
C2:N$30: C2:IC2.14 C2:R26.2 C2:R28.1
C2:N$31: C2:IC3.P$14 C2:R28.2 C2:R29.2
C2:N$32: C2:C3.1 C2:IC3.P$13 C2:R30.2 C2:R32.1
C2:N$33: C2:R30.1 C2:R31.2
C2:N$34: C2:C3.2 C2:IC3.P$12 C2:IC4.10 C2:R32.2
C2:N$35: C2:C4.1 C2:IC4.9 C2:R33.1 C2:R34.2
C2:N$36: C2:IC3.P$16 C2:R35.2
C2:N$37: C2:R35.1 C2:R36.1 C2:T4.C
C2:N$38: C2:IC4.1 C2:IC4.2 C2:T4.B
C2:N$39: C2:IC5.1 C2:IC5.2 C2:R39.2
C2:N$40: C2:IC5.3 C2:R37.1 C2:R38.1
C2:N$41: C2:C5.1 C2:IC5.6 C2:R39.1 C2:R40.1
C2:N$42: C2:C5.2 C2:IC5.7 C2:Q1.2 C2:R40.2
C2:N$43: C2:IC6.5 C2:RN1.3 C2:RN1.4
C2:N$44: C2:C6.1 C2:IC5.9 C2:Q1.6 C2:R41.1
C2:N$45: C2:IC6.6 C2:RN1.1 C2:RN1.2
C2:N$46: C2:Q1.1 C2:Q1.4 C2:R42.2
C2:N$47: C2:IC6.2 C2:R47.1 C2:R48.2
C2:N$48: C2:IC5.13 C2:RN2.5 C2:RN2.7
C2:N$50: C2:IC6.3 C2:R49.2 C2:R50.2
C2:PAN_CV: C2:IC5.14 C2:R49.1 C2:RN1.7 C2:RN2.4
C2:PAN_CV_L: C2:IC6.7 C2:R7.1 C2:RN1.8
C2:PAN_CV_R: C2:IC6.1 C2:R25.1 C2:R47.2
C2:REF_5: C2:R50.1 C2:RN1.6
C2:VOLUME_CV_LOG: C2:C6.2 C2:IC4.3 C2:IC4.5 C2:IC5.8 C2:R42.1
C3:N$1: C3:IC1.P$4 C3:R1.2
C3:N$2: C3:R1.1 C3:R2.2
C3:N$3: C3:IC1.P$3 C3:R3.2 C3:R4.2
C3:N$4: C3:IC1.P$1 C3:R6.2
C3:N$5: C3:IC1.P$2 C3:R5.2
C3:N$6: C3:R6.1 C3:T1.C
C3:N$7: C3:D1.A C3:IC2.1 C3:T1.B
C3:N$8: C3:D1.C C3:IC2.2 C3:R7.2 C3:T1.E
C3:N$9: C3:IC1.P$5 C3:IC2.9 C3:R9.1
C3:N$10: C3:R8.1 C3:R9.2
C3:N$11: C3:IC2.8 C3:R8.2 C3:R10.1
C3:N$12: C3:C1.1 C3:IC3.P$4 C3:R12.2 C3:R14.1
C3:N$13: C3:IC3.P$3 C3:R10.2 C3:R11.2
C3:N$14: C3:R12.1 C3:R13.2
C3:N$15: C3:C2.1 C3:IC4.13 C3:R15.1 C3:R16.2
C3:N$16: C3:C1.2 C3:IC4.12 C3:R14.2
C3:N$17: C3:IC3.P$1 C3:R17.2
C3:N$18: C3:R17.1 C3:R18.1 C3:T2.C
C3:N$19: C3:IC4.6 C3:IC4.7 C3:T2.B
C3:N$20: C3:IC1.P$13 C3:R19.2
C3:N$21: C3:R19.1 C3:R20.2
C3:N$22: C3:IC1.P$14 C3:R21.2 C3:R22.2
C3:N$23: C3:IC1.P$15 C3:R23.2
C3:N$24: C3:IC1.P$16 C3:R24.2
C3:N$25: C3:R24.1 C3:T3.C
C3:N$26: C3:D2.A C3:IC2.7 C3:T3.B
C3:N$27: C3:D2.C C3:IC2.6 C3:R25.2 C3:T3.E
C3:N$28: C3:IC1.P$12 C3:IC2.13 C3:R27.1
C3:N$29: C3:R26.1 C3:R27.2
C3:N$30: C3:IC2.14 C3:R26.2 C3:R28.1
C3:N$31: C3:IC3.P$14 C3:R28.2 C3:R29.2
C3:N$32: C3:C3.1 C3:IC3.P$13 C3:R30.2 C3:R32.1
C3:N$33: C3:R30.1 C3:R31.2
C3:N$34: C3:C3.2 C3:IC3.P$12 C3:IC4.10 C3:R32.2
C3:N$35: C3:C4.1 C3:IC4.9 C3:R33.1 C3:R34.2
C3:N$36: C3:IC3.P$16 C3:R35.2
C3:N$37: C3:R35.1 C3:R36.1 C3:T4.C
C3:N$38: C3:IC4.1 C3:IC4.2 C3:T4.B
C3:N$39: C3:IC5.1 C3:IC5.2 C3:R39.2
C3:N$40: C3:IC5.3 C3:R37.1 C3:R38.1
C3:N$41: C3:C5.1 C3:IC5.6 C3:R39.1 C3:R40.1
C3:N$42: C3:C5.2 C3:IC5.7 C3:Q1.2 C3:R40.2
C3:N$43: C3:IC6.5 C3:RN1.3 C3:RN1.4
C3:N$44: C3:C6.1 C3:IC5.9 C3:Q1.6 C3:R41.1
C3:N$45: C3:IC6.6 C3:RN1.1 C3:RN1.2
C3:N$46: C3:Q1.1 C3:Q1.4 C3:R42.2
C3:N$47: C3:IC6.2 C3:R47.1 C3:R48.2
C3:N$48: C3:IC5.13 C3:RN2.5 C3:RN2.7
C3:N$50: C3:IC6.3 C3:R49.2 C3:R50.2
C3:PAN_CV: C3:IC5.14 C3:R49.1 C3:RN1.7 C3:RN2.4
C3:PAN_CV_L: C3:IC6.7 C3:R7.1 C3:RN1.8
C3:PAN_CV_R: C3:IC6.1 C3:R25.1 C3:R47.2
C3:REF_5: C3:R50.1 C3:RN1.6
C3:VOLUME_CV_LOG: C3:C6.2 C3:IC4.3 C3:IC4.5 C3:IC5.8 C3:R42.1
C4:N$1: C4:IC1.P$4 C4:R1.2
C4:N$2: C4:R1.1 C4:R2.2
C4:N$3: C4:IC1.P$3 C4:R3.2 C4:R4.2
C4:N$4: C4:IC1.P$1 C4:R6.2
C4:N$5: C4:IC1.P$2 C4:R5.2
C4:N$6: C4:R6.1 C4:T1.C
C4:N$7: C4:D1.A C4:IC2.1 C4:T1.B
C4:N$8: C4:D1.C C4:IC2.2 C4:R7.2 C4:T1.E
C4:N$9: C4:IC1.P$5 C4:IC2.9 C4:R9.1
C4:N$10: C4:R8.1 C4:R9.2
C4:N$11: C4:IC2.8 C4:R8.2 C4:R10.1
C4:N$12: C4:C1.1 C4:IC3.P$4 C4:R12.2 C4:R14.1
C4:N$13: C4:IC3.P$3 C4:R10.2 C4:R11.2
C4:N$14: C4:R12.1 C4:R13.2
C4:N$15: C4:C2.1 C4:IC4.13 C4:R15.1 C4:R16.2
C4:N$16: C4:C1.2 C4:IC4.12 C4:R14.2
C4:N$17: C4:IC3.P$1 C4:R17.2
C4:N$18: C4:R17.1 C4:R18.1 C4:T2.C
C4:N$19: C4:IC4.6 C4:IC4.7 C4:T2.B
C4:N$20: C4:IC1.P$13 C4:R19.2
C4:N$21: C4:R19.1 C4:R20.2
C4:N$22: C4:IC1.P$14 C4:R21.2 C4:R22.2
C4:N$23: C4:IC1.P$15 C4:R23.2
C4:N$24: C4:IC1.P$16 C4:R24.2
C4:N$25: C4:R24.1 C4:T3.C
C4:N$26: C4:D2.A C4:IC2.7 C4:T3.B
C4:N$27: C4:D2.C C4:IC2.6 C4:R25.2 C4:T3.E
C4:N$28: C4:IC1.P$12 C4:IC2.13 C4:R27.1
C4:N$29: C4:R26.1 C4:R27.2
C4:N$30: C4:IC2.14 C4:R26.2 C4:R28.1
C4:N$31: C4:IC3.P$14 C4:R28.2 C4:R29.2
C4:N$32: C4:C3.1 C4:IC3.P$13 C4:R30.2 C4:R32.1
C4:N$33: C4:R30.1 C4:R31.2
C4:N$34: C4:C3.2 C4:IC3.P$12 C4:IC4.10 C4:R32.2
C4:N$35: C4:C4.1 C4:IC4.9 C4:R33.1 C4:R34.2
C4:N$36: C4:IC3.P$16 C4:R35.2
C4:N$37: C4:R35.1 C4:R36.1 C4:T4.C
C4:N$38: C4:IC4.1 C4:IC4.2 C4:T4.B
C4:N$39: C4:IC5.1 C4:IC5.2 C4:R39.2
C4:N$40: C4:IC5.3 C4:R37.1 C4:R38.1
C4:N$41: C4:C5.1 C4:IC5.6 C4:R39.1 C4:R40.1
C4:N$42: C4:C5.2 C4:IC5.7 C4:Q1.2 C4:R40.2
C4:N$43: C4:IC6.5 C4:RN1.3 C4:RN1.4
C4:N$44: C4:C6.1 C4:IC5.9 C4:Q1.6 C4:R41.1
C4:N$45: C4:IC6.6 C4:RN1.1 C4:RN1.2
C4:N$46: C4:Q1.1 C4:Q1.4 C4:R42.2
C4:N$47: C4:IC6.2 C4:R47.1 C4:R48.2
C4:N$48: C4:IC5.13 C4:RN2.5 C4:RN2.7
C4:N$50: C4:IC6.3 C4:R49.2 C4:R50.2
C4:PAN_CV: C4:IC5.14 C4:R49.1 C4:RN1.7 C4:RN2.4
C4:PAN_CV_L: C4:IC6.7 C4:R7.1 C4:RN1.8
C4:PAN_CV_R: C4:IC6.1 C4:R25.1 C4:R47.2
C4:REF_5: C4:R50.1 C4:RN1.6
C4:VOLUME_CV_LOG: C4:C6.2 C4:IC4.3 C4:IC4.5 C4:IC5.8 C4:R42.1
GND: AUX_IN.3 AUX_OUT.3 BAL_L.3 BAL_R.3 C1:C7.1 C1:C8.1 C1:C9.1 C1:C10.1 C1:C11.1 C1:C12.1 C1:C13.2 C1:C14.2 C1:C15.2 C1:C16.2 C1:C17.2 C1:C18.2 C1:IC2.3 C1:IC2.5 C1:IC2.10 C1:IC2.12 C1:IC5.5 C1:IC5.10 C1:Q1.3 C1:Q1.5 C1:R2.1 C1:R3.1 C1:R11.1 C1:R16.1 C1:R20.1 C1:R21.1 C1:R29.1 C1:R34.1 C1:R48.1 C1:RN1.5 C1:T2.E C1:T4.E C2:C7.1 C2:C8.1 C2:C9.1 C2:C10.1 C2:C11.1 C2:C12.1 C2:C13.2 C2:C14.2 C2:C15.2 C2:C16.2 C2:C17.2 C2:C18.2 C2:IC2.3 C2:IC2.5 C2:IC2.10 C2:IC2.12 C2:IC5.5 C2:IC5.10 C2:Q1.3 C2:Q1.5 C2:R2.1 C2:R3.1 C2:R11.1 C2:R16.1 C2:R20.1 C2:R21.1 C2:R29.1 C2:R34.1 C2:R48.1 C2:RN1.5 C2:T2.E C2:T4.E C3:C7.1 C3:C8.1 C3:C9.1 C3:C10.1 C3:C11.1 C3:C12.1 C3:C13.2 C3:C14.2 C3:C15.2 C3:C16.2 C3:C17.2 C3:C18.2 C3:IC2.3 C3:IC2.5 C3:IC2.10 C3:IC2.12 C3:IC5.5 C3:IC5.10 C3:Q1.3 C3:Q1.5 C3:R2.1 C3:R3.1 C3:R11.1 C3:R16.1 C3:R20.1 C3:R21.1 C3:R29.1 C3:R34.1 C3:R48.1 C3:RN1.5 C3:T2.E C3:T4.E C4:C7.1 C4:C8.1 C4:C9.1 C4:C10.1 C4:C11.1 C4:C12.1 C4:C13.2 C4:C14.2 C4:C15.2 C4:C16.2 C4:C17.2 C4:C18.2 C4:IC2.3 C4:IC2.5 C4:IC2.10 C4:IC2.12 C4:IC5.5 C4:IC5.10 C4:Q1.3 C4:Q1.5 C4:R2.1 C4:R3.1 C4:R11.1 C4:R16.1 C4:R20.1 C4:R21.1 C4:R29.1 C4:R34.1 C4:R48.1 C4:RN1.5 C4:T2.E C4:T4.E C5.GND1 C5.GND2 C5.GND3 C5.GND4 C5.GND5 C5.GND6 IC1.2 IC1.6 IC1.9 IC1.12 IC6.2 IC6.5 JP1.20 JP2.5 U21.2 U22.2
N$29: C1:C2.2 C1:IC4.14 C1:R15.2 R3.1
N$30: C1:C4.2 C1:IC4.8 C1:R33.2 R4.1
N$32: IC1.10 R12.1 RN1.2
N$33: C2:C2.2 C2:IC4.14 C2:R15.2 R5.1
N$35: C2:C4.2 C2:IC4.8 C2:R33.2 R6.1
N$37: C3:C2.2 C3:IC4.14 C3:R15.2 R7.1
N$38: C3:C4.2 C3:IC4.8 C3:R33.2 R8.1
N$39: C4:C2.2 C4:IC4.14 C4:R15.2 R9.1
N$40: C4:C4.2 C4:IC4.8 C4:R33.2 R10.1
N$42: IC1.3 R16.1 RN1.3
N$43: IC6.3 R17.2 R18.1
N$45: IC6.6 R13.2 R14.1
N$47: C5.POS1 C5.POS2 D1.A
N$48: C5.NEG1 C5.NEG2 D2.C
OUT_L: JP2.1 RN1.7
OUT_R: JP2.2 RN1.6
REF_5: JP4.8 R21.1 U21.1
REF_10: JP4.9 R22.1 U22.1
SUM_L: IC1.5 R3.2 R5.2 R7.2 R9.2 R19.2 RN1.1
SUM_R: IC1.13 R4.2 R6.2 R8.2 R10.2 R20.2 RN1.4

## Tracks (layer width: path | path; a pad name or v marks a point on that pad's centre or on a via)
1_IN_L  (via drill 0.3)
  Top 0.152: v12.12,89.75 15,92.62 28.38,92.62 JP1.2
  Bottom 0.152: v12.12,89.75 12.12,85.38 13.5,84 C1:R4.1
1_IN_R  (via drill 0.3)
  Top 0.152: v23.12,91 23.88,90.25 28.38,90.25 JP1.3
  Bottom 0.152: v23.12,91 23.12,93.88 22.75,94.25 C1:R22.1
1_PAN_ATT_R  (via drill 0.3)
  Top 0.152: v3.51,28.63 2.26,29.88 1.38,29.88 0.5,30.75 0.5,82.5 28.38,82.5 JP1.6
  Bottom 0.152: v3.51,28.63 3.51,27.79 C1:RN2.3
1_PAN_ATT_W  (via drill 0.3)
  Top 0.152: v4.62,26.75 v10.5,26.75 | v21.62,57.88 20.25,56.5 v15.62,56.5 | v11.75,38.38 10.25,36.88 v7.5,36.88
  Bottom 0.152: 3.25,26.75 2.25,26.75 2,26.5 2,26.25 1.75,26 C1:RN2.8 | 3.25,26.75 3.25,26 C1:RN2.6 | v10.5,26.75 11.5,26.75 C1:IC5.12 | 3.25,26.75 v4.62,26.75 4.62,26.88 6,28.25 6,32.62 5.12,33.5 5.12,34.88 6.5,34.88 6.75,35.12 6.75,36.12 v7.5,36.88 | v21.62,57.88 21.62,65.12 26.25,69.75 26.25,82.88 28.38,85 JP1.5 | v15.62,56.5 14.5,55.38 14.5,47.25 12.38,45.12 12.38,43.38 11.75,42.75 v11.75,38.38
1_PAN_CV_IN  (via drill 0.35)
  Top 0.152: JP1.4 27.71,86.9 27.63,86.9 25.82,85.09 v1.77,85.09 | v6.88,60.98 6.88,59.71 v6.9,59.69 | v7.22,35.72 7.06,35.56 4.69,35.56 v4.44,35.81 | v4.66,34.67 4.02,34.03 3.76,34.03 2.75,33.02 v1.83,33.02
  Bottom 0.152: 2.5,27.62 1.75,27.62 C1:RN2.1 | v1.77,85.09 2.03,84.83 2.03,74.62 4.34,72.32 1.91,69.89 1.91,64.09 2.03,63.97 3.89,63.97 v6.88,60.98 | v6.9,59.69 6.42,59.21 6.22,59.21 6.1,59.09 6.1,57.51 3.9,57.51 3.61,57.22 3.61,55.65 3.73,55.53 6.33,55.53 6.33,53.53 4.56,51.75 4.56,48.97 4.93,48.6 6.59,48.6 7.28,47.91 7.28,43.3 7.93,42.64 7.93,36.43 v7.22,35.72 | v4.44,35.81 4.44,34.89 v4.66,34.67 | v1.83,33.02 1.83,31.69 2.35,31.17 2.35,28.7 2.32,28.68 2.32,27.8 2.5,27.62 | C1:RN2.2 2.5,27.62
1_VOLUME_CV  (via drill 0.3)
  Top 0.152: v24,32.25 23.5,32.75 v20.38,32.75 | v18.38,41.38 5.25,41.38 v2.38,44.25 | v1.12,73.75 7.38,80 28.38,80 JP1.7
  Bottom 0.152: v24,32.25 24,26.5 23.75,26.25 C1:R38.2 | v20.38,32.75 19.12,34 19.12,36.12 18.38,36.88 v18.38,41.38 | v2.38,44.25 1.12,45.5 v1.12,73.75
2_IN_L  (via drill 0.3)
  Top 0.152: v21.38,76.75 22,77.38 28.38,77.38 JP1.8
  Bottom 0.152: v21.38,76.75 21.38,73.62 19.38,73.62 15.88,70.12 15.88,67.5 14,65.62 C2:R4.1
2_IN_R  (via drill 0.3)
  Top 0.152: v22.88,75.75 23.62,75 28.38,75 JP1.9
  Bottom 0.152: v22.88,75.75 22.88,79.25 20.5,79.25 C2:R22.1
2_PAN_ATT_R  (via drill 0.3)
  Top 0.152: v26.12,31.38 26,31.25 23.38,31.25 23.25,31.38 22.25,31.38 v22.12,31.25 | v15.88,66.75 16.38,67.25 28.38,67.25 JP1.12
  Bottom 0.152: v26.12,31.38 27,30.5 27,26.62 26.25,26.62 C2:RN2.3 | v22.12,31.25 22.12,45.75 19.5,48.38 19.5,52.12 16.12,55.5 16.12,56.62 15.88,56.88 v15.88,66.75
2_PAN_ATT_W  (via drill 0.3)
  Top 0.152: v10.62,19.12 10.75,19.25 22.88,19.25 v27.12,23.5 | v1.62,57.62 10.62,66.62 11.62,66.62 14,69 27.62,69 28.38,69.75 JP1.11 | v3.12,41.25 7,37.38 v8.88,37.38 | v9.25,31 9.25,30.38 9,30.12 9,29.5 10.88,29.5 11,29.62 v27.88,29.62
  Bottom 0.152: 28.5,26.12 28.5,25 27.88,25 C2:RN2.8 27.75,24.88 27.75,24.12 v27.12,23.5 | 28.5,26.12 28.12,26.5 27.88,26.5 C2:RN2.6 | v10.62,19.12 11.5,19.12 C2:IC5.12 | v1.62,57.62 1.5,57.5 1.5,48.25 3.12,46.62 v3.12,41.25 | v8.88,37.38 9.25,37 v9.25,31 | v27.88,29.62 28.5,29 28.5,26.12
2_PAN_CV_IN  (via drill 0.3)
  Top 0.152: v25.88,23.5 24.25,21.88 v22.25,21.88 | v22.75,16.5 23.75,15.5 30.62,15.5 31.25,16.12 v40.25,16.12 | v39.38,35.38 39.88,35.88 52.88,35.88 53.5,36.5 v55.75,36.5 | v53.75,71.62 53.25,72.12 43,72.12 42.38,72.75 28.75,72.75 28.5,72.5 JP1.10
  Bottom 0.152: C2:RN2.2 26.25,25 C2:RN2.1 26.12,24.88 25.88,24.62 v25.88,23.5 | v22.25,21.88 22.38,21.75 22.38,19.75 22.75,19.38 v22.75,16.5 | v40.25,16.12 40.88,16.75 40.88,23 39.62,24.25 39.62,26 40,26.38 41.12,26.38 41.25,26.5 41.25,29.88 41.12,30 39.62,30 39.62,35.12 v39.38,35.38 | v55.75,36.5 56.62,37.38 56.62,52 55.25,53.38 55.25,65.12 53.75,66.62 v53.75,71.62
2_VOLUME_CV  (via drill 0.3)
  Top 0.152: v24.12,16.5 24.25,16.62 46.75,16.62 47,16.38 47.88,16.38 48.75,17.25 v50,17.25 | v50.5,24.38 50.5,25.38 50.38,25.5 v50.38,28 | v49.75,37.38 50.75,38.38 v54.25,38.38 | v54.75,60.88 53.5,62.12 31.62,62.12 29,64.75 28.5,64.75 JP1.13
  Bottom 0.152: v24.12,16.5 24.12,18.25 23.62,18.75 C2:R38.2 | v50,17.25 50.5,17.75 50.5,20.38 50.38,20.5 50.38,22.88 50.5,23 v50.5,24.38 | v50.38,28 49.75,28.62 v49.75,37.38 | v54.25,38.38 54.25,42.88 54.75,43.38 v54.75,60.88
3_IN_L  (via drill 0.3)
  Top 0.152: v18,61.5 18.62,62.12 28.38,62.12 JP1.14
  Bottom 0.152: v18,61.5 19.25,60.25 19.25,59.12 19.12,59 19.12,53 19.88,52.25 19.88,49.5 20.38,49 C3:R4.1
3_IN_R  (via drill 0.3)
  Top 0.152: v17.62,60.5 18.38,59.75 28.38,59.75 JP1.15
  Bottom 0.152: v17.62,60.5 16.88,59.75 C3:R22.1
3_PAN_ATT_R  (via drill 0.3)
  Top 0.152: v31.75,36 31.25,36.5 v26,36.5 | v25.75,51.25 26.5,52 28.38,52 JP1.18
  Bottom 0.152: v31.75,36 31.75,33.62 30.75,32.62 30.75,26.62 30.12,26.62 C3:RN2.3 | v26,36.5 26.12,36.62 26.12,46.12 25.75,46.5 v25.75,51.25
3_PAN_ATT_W  (via drill 0.3)
  Top 0.152: v10,11.62 9.5,12.12 0.62,12.12 0.38,12.38 0.38,21.38 16.25,21.38 17.75,22.88 v24.25,22.88 | v32.5,25.62 v24.62,25.62 | v24.12,53.88 27.75,53.88 28.38,54.5 JP1.17 | v32.62,30.88 v23.12,30.88
  Bottom 0.152: 32.38,26.12 32.38,25.62 | 32.38,25.62 32.38,25 31.75,25 C3:RN2.8 | 32.38,26.12 32,26.5 31.75,26.5 C3:RN2.6 | v10,11.62 11.5,11.62 C3:IC5.12 | v24.25,22.88 24.62,23.25 v24.62,25.62 | 32.38,25.62 v32.5,25.62 | v24.12,53.88 23.62,53.38 23.62,34.88 23.12,34.38 v23.12,30.88 | v32.62,30.88 32.38,30.62 32.38,26.12
3_PAN_CV_IN  (via drill 0.3)
  Top 0.152: v29.38,29.12 28.12,30.38 22.88,30.38 v22.5,30.75 | v23,55.25 24.88,57.12 28.38,57.12 JP1.16
  Bottom 0.152: C3:RN2.1 30.12,25 30.12,25.75 C3:RN2.2 30,25.88 29.38,25.88 v29.38,29.12 | v22.5,30.75 22.62,30.88 22.62,54.88 v23,55.25
3_VOLUME_CV  (via drill 0.3)
  Top 0.152: v22.62,12.25 22.5,12.38 11.25,12.38 8,15.62 v1.25,15.62 | v1,30.88 3.88,33.75 7,33.75 7.12,33.88 20.88,33.88 21.62,33.12 26.5,33.12 27.88,31.75 JP4.1
  Bottom 0.152: v22.62,12.25 23.5,11.38 C3:R38.2 | v1.25,15.62 0.75,16.12 0.75,28.12 1,28.38 v1,30.88
4_IN_L  (via drill 0.3)
  Top 0.152: v38.5,35.5 v20.5,35.5
  Bottom 0.152: v20.5,35.5 20.5,35 20.12,34.62 C4:R4.1 | v38.5,35.5 38.62,35.38 38.62,31.75 JP4.2
4_IN_R  (via drill 0.3)
  Top 0.152: v17.12,47.25 17.88,46.5 v23.12,46.5 | v23.12,40.5 25.12,38.5 31.5,38.5 32.12,37.88 38.75,37.88 38.88,37.75 43,37.75 43.12,37.88 43.38,37.88 v43.88,37.38 | v44.5,34.38 44.12,34 42.25,34 41.25,33 41.25,31.75 JP4.3
  Bottom 0.152: v17.12,47.25 17.12,46.75 16.62,46.25 C4:R22.1 | v23.12,40.5 v23.12,46.5 | v43.88,37.38 44.5,36.75 v44.5,34.38
4_PAN_ATT_R  (via drill 0.3)
  Top 0.152: v33,26.62 33.88,27.5 39.12,27.5 39.25,27.38 39.5,27.38 39.62,27.5 42.38,27.5 42.5,27.38 46.88,27.38 v47.88,28.38
  Bottom 0.152: v33,26.62 33.75,26.62 C4:RN2.3 | v47.88,28.38 48.75,29.25 JP4.6
4_PAN_ATT_W  (via drill 0.3)
  Top 0.152: v8.62,22.62 9,23 12.38,23 v12.88,23.5 | v13.62,24.5 14.62,25.5 14.75,25.5 v16.5,27.25 | v19.75,30.5 21,31.75 v24.5,31.75 | v24.62,26.88 24.75,27 32.75,27 35,29.25 v36.12,29.25 44,29.25 46.12,31.38 46.12,31.75 JP4.5
  Bottom 0.152: 35.75,26.5 36.12,26.12 36.12,25 35.5,25 C4:RN2.8 | 35.75,26.5 35.5,26.5 C4:RN2.6 35.75,26.5 | v8.62,22.62 8.62,21.25 9.12,20.75 9.12,18.38 7.88,18.38 7.62,18.12 7.62,16.75 8.5,15.88 8.5,13.62 9.12,13 9.12,9.25 8.75,8.88 8.75,6.38 9.88,5.25 9.88,4 11.5,4 C4:IC5.12 | v12.88,23.5 13.62,24.25 v13.62,24.5 | v16.5,27.25 16.62,27.38 16.62,28.38 18.25,30 19.75,30 v19.75,30.5 | v24.5,31.75 24.62,31.62 v24.62,26.88 | 35.75,26.5 36.12,26.88 v36.12,29.25
4_PAN_CV_IN  (via drill 0.3)
  Top 0.152: v34.25,24.12 34.5,23.88 40,23.88 40.12,23.75 v40.75,23.75 | v41.88,30.12 43.5,31.75 JP4.4
  Bottom 0.152: C4:RN2.2 33.88,25.75 33.88,25 C4:RN2.1 33.88,24.88 34.25,24.5 v34.25,24.12 | v40.75,23.75 41.75,24.75 41.75,30 v41.88,30.12
4_VOLUME_CV  (via drill 0.3)
  Top 0.152: v26.75,7.25 28.75,9.25 39,9.25 40.62,10.88 41.62,10.88 43.62,12.88 50.25,12.88 53,15.62 v53,21.75
  Bottom 0.152: v26.75,7.25 26.75,4.38 23.62,4.38 C4:R38.2 | v53,21.75 53.12,21.88 53.12,27.75 51.38,29.5 51.38,31.75 JP4.7
+12V  (via drill 0.3)
  Top 0.152: v33.38,6.88 33.25,6.75 25.5,6.75 v25.38,6.88 v10.62,6.88 | v18.25,23.38 v22.25,23.38 22.88,24 27.25,24 28.5,22.75 37,22.75 v37.12,22.62 41.88,22.62 v42.25,22.25 | v20.62,42.88 25,42.88 C4:R13.1 25.12,42.88 27.75,42.88 28.25,43.38 v33.25,43.38 33.5,43.12 44.5,43.12 44.62,43 52.25,43 52.5,42.75 C3:R13.1 52.62,42.62 58.12,42.62 v58.5,42.25 65.38,42.25 v65.88,42.75 | v58.88,54.12 57.62,52.88 52.62,52.88 C3:R31.1 | v9.5,30 20.12,30 v20.25,30.12 | v20.75,56 v12.88,56 | v69.5,95.12 67.12,92.75 66.12,92.75 | 66.12,92.75 v59.62,92.75 52.62,92.75 C1:R31.1 52.5,92.75 51,94.25 29.5,94.25 28.5,95.25 JP1.1 20.75,95.25 v20.5,95.5 | 66.12,92.75 v70.12,88.75 | v64.5,61.88 63.62,62.75 63.5,62.75 | 54.5,62.75 52.62,62.75 C2:R13.1 | 54.5,62.75 63.5,62.75 | 68.62,66.5 68.12,66 66.75,66 63.5,62.75 | 68.62,66.5 v69.88,67.75 | v33.5,66.25 33.62,66.12 38.5,66.12 40,64.62 52.62,64.62 54.5,62.75 | 68.62,66.5 v74.12,61 | v56.12,80.88 54.5,80.88 52.62,82.75 C1:R13.1
  Bottom 0.152: 42.5,22.25 42.5,19.25 43.62,18.12 D1.C | 42.5,22.25 42.5,24.12 43.62,25.25 R22.2 | 37.75,22.62 37.75,24.38 38.62,25.25 R21.2 | 37.75,22.62 37.75,21.62 37,20.88 37,19.12 36.88,19 IC1.4 | C2:IC5.4 17.5,18.5 18.12,18.5 18.12,21.25 17.38,22 17.38,22.38 C2:C9.2 17.38,22.5 18.12,23.25 18.12,23.38 | 18.12,23.38 18.12,26.12 17.5,26.12 C1:IC5.4 | C4:IC5.4 17.38,3.38 16.62,3.38 16.62,6.5 17.25,7.12 C4:C9.2 17.38,7.12 21.25,7.12 21.25,7 21.38,6.88 24.5,6.88 24.5,7.62 C4:R37.2 | 16.62,13.38 16.62,14 17.25,14.62 C3:C9.2 | 16.62,13.38 16.62,11 17.38,11 C3:IC5.4 | C3:R37.2 23.25,14.88 24.5,13.62 24.5,7.75 C4:R37.2 | C3:R37.2 23.25,15 24.62,16.38 24.62,21 23.25,22.38 C2:R37.2 23.12,22.5 v22.25,23.38 | v33.38,6.88 33.38,6.5 33.75,6.12 IC6.8 | v25.38,6.88 24.62,7.62 C4:R37.2 | 16.62,13.38 21.62,13.38 23.12,14.88 C3:R37.2 | v18.25,23.38 18.12,23.38 | v37.12,22.62 37.75,22.62 | v42.25,22.25 42.5,22.25 | v10.62,6.88 9.5,6.88 C4:R41.2 9.5,7 9.5,14 C3:R41.2 9.5,14.12 9.5,21.75 C2:R41.2 9.38,21.88 9.38,22.5 8.62,23.25 8.62,23.62 8.88,23.88 8.88,28.38 9.38,28.88 C1:R41.2 9.5,29 v9.5,30 | 33.62,37.38 34.38,37.38 C4:IC4.4 | 33.62,37.38 33.62,33.5 C4:C12.2 | C3:IC4.4 34.5,51.38 35.12,51.38 35.12,48.25 34.88,48 C3:C10.2 34.75,47.88 33.25,46.38 | 33.5,43.25 33.25,43.25 v33.25,43.38 33.25,46.38 | 33.5,43.25 34.38,43.25 C4:IC2.4 | 33.25,46.38 33.25,46.75 32.75,47.25 C4:C8.2 | 33.62,37.38 33.5,37.5 33.5,43.25 | 20.38,30 20.25,29.88 20.25,29.25 19.38,29.25 C1:C9.2 | 21,30 23.12,30 23.12,29.88 C1:R37.2 | 21,30 20.38,30 | C4:R23.1 19.88,44 20.62,43.25 v20.62,42.88 20.62,39.38 19.88,38.62 C4:R5.1 19.88,38.5 21,37.38 21,30
  Bottom 0.152: C4:C11.2 65.12,42.75 v65.88,42.75 66.25,42.75 66.25,42 66.5,41.75 66.5,30.5 C4:R31.1 | v58.5,42.25 59.62,41.12 C4:IC3.P$11 | v58.88,54.12 58.88,58.12 59.5,58.75 C3:IC3.P$11 | 51.88,47 51.88,52.12 52.5,52.75 C3:R31.1 | 51.88,47 51.88,43.38 52.5,42.75 C3:R13.1 | 20.38,30 v20.25,30.12 | 10.75,77.12 11.25,76.62 11.25,75.5 C2:IC1.P$11 | 10.75,77.12 10.25,77.62 C2:C7.2 | 14.88,90.88 11.38,94.38 C1:IC1.P$11 11.25,94.5 11.25,95.25 10.25,95.25 9.12,96.38 7.88,96.38 C1:C7.2 | 14.88,90.88 15.62,90.12 15.62,84.88 C1:R5.1 16.5,83.88 16.5,81.25 14.38,81.25 14,81.62 14,82.88 12.62,82.88 12.38,82.62 12.38,80.12 | 20.12,95.88 20.12,97.38 19.38,98.12 C1:R23.1 | 20.12,95.88 19.5,95.25 17.12,95.25 17.12,93.12 14.88,90.88 | 10.75,77.12 12.38,78.75 12.38,80.12 | 9.62,46 9.25,45.62 9.25,43.38 9.38,43.25 11.25,43.25 11.25,42.38 C4:IC1.P$11 | 9.62,46 9.88,46.25 C4:C7.2 9.62,46 | 9.62,46 9.62,49.5 10.5,50.38 10.5,56.75 11.25,57.5 C3:IC1.P$11 11.38,57.5 v12.88,56 | C3:R5.1 20.75,54.5 v20.75,56 20.75,59.12 20.25,59.62 C3:R23.1 20.12,59.75 19.62,60.25 19.62,60.5 17.75,62.38 C3:C7.2 17.62,62.5 17,63.12 17,64.5 | 17,64.5 17,65.5 C2:R5.1 | 17,64.5 19.62,67.12 | 19.62,67.12 19.75,67.25 C2:C10.2 19.62,67.12 | 19.62,67.12 19.62,71.12 21.75,73.25 21.75,74 22.12,74.38 C2:R23.1 22.12,74.5 22.12,78.38 15.12,78.38 14.75,78.75 14.75,80.12 12.38,80.12 | C1:C8.2 25.12,93.88 28.38,93.88 28.38,95.25 JP1.1 33.38,95.25 | C2:IC2.4 34.38,73.75 33,73.75 33,76.75 32.88,76.88 C2:C11.2 32.88,77 33.25,77.38 33.25,83.88 34,84.62 34.38,84.62 C1:IC4.4 34.5,84.75 35.12,84.75 35.12,88.25 34.62,88.75 C1:C11.2 34.5,88.88 33.38,90 33.38,92.75
  Bottom 0.152: 33.38,92.75 34.38,92.75 C1:IC2.4 | 33.38,92.75 33.38,95.25 | 33.38,95.25 33.38,96.12 34.5,97.25 C1:C12.2 | v69.5,95.12 69.5,95.88 70.88,97.25 C1:C10.2 | v70.12,88.75 70.12,87.88 C1:IC6.8 | v59.62,92.75 59.62,94.38 C1:IC3.P$11 | C1:R13.1 52.5,82.88 51.88,83.5 51.88,92 52.5,92.62 C1:R31.1 | C4:IC6.8 73.75,46 73.75,48.12 C4:C10.2 73.88,48.25 74.5,48.88 74.5,54.38 72.5,56.38 C3:IC6.8 72.5,56.5 72.75,56.75 72.75,57.75 73.38,58.38 C3:C12.2 73.5,58.5 74.12,59.12 v74.12,61 | C3:IC2.4 34.5,57 35.12,57 35.12,59.75 34.62,60.25 C3:C8.2 34.5,60.38 33.62,61.25 33.62,63.12 33.38,63.38 33.38,65.88 33.62,66.12 | 33.62,66.12 34.38,66.12 C2:IC4.4 | 33.62,66.25 33.62,69.12 34.25,69.75 C2:C12.2 | 33.62,66.25 33.62,66.12 | 59.62,76.25 60.75,77.38 C2:C8.2 | 59.62,76.25 59.62,75.38 C2:IC3.P$11 | v64.5,61.88 64.5,61.38 64.88,61 C3:C11.2 | v69.88,67.75 69.88,68.5 70,68.62 C2:IC6.8 | 59.62,76.25 57.62,76.25 57.62,78.25 58.5,79.12 59.12,79.12 59.12,80.5 58.88,80.75 56.12,80.75 | 56.12,80.75 55.88,80.75 55.88,76.25 52.62,73 C2:R31.1 52.62,72.88 53.25,72.25 53.25,64.25 52.62,63.62 52.62,62.88 C2:R13.1 52.62,62.75 53.62,61.75 53.62,47 51.88,47 | v33.5,66.25 33.62,66.25 | 56.12,80.75 v56.12,80.88 | v20.5,95.5 20.12,95.88
-12V  (via drill 0.3)
  Top 0.152: v39.75,15.25 39.5,15 v37.62,15 | v9.5,3 9.75,3.25 v12.5,3.25 18.12,3.25 19,4.12 36.88,4.12 v37.88,5.12 | 24.88,37.88 13.5,37.88 v12,36.38 3.21,36.38 v2.71,35.88 | 24.88,37.88 25,37.75 C4:R13.3 24.88,37.88 | v31,38 30.88,37.88 24.88,37.88 | v9.5,50.62 10.38,51.5 v12,51.5 13.88,49.62 v21.62,49.62 v24.12,49.62 28.38,49.62 JP1.19 28.5,49.62 v39.38,49.62 | v12.5,26.12 10.62,28 8.25,28 8.12,28.12 5.25,28.12 v5.12,28 | C2:R31.3 52.5,78 32.88,78 v32.75,78.12 32.38,78.5 v24.88,78.5 | v11.5,89.5 11.75,89.25 v20.38,89.25 | v67.25,93.5 63,97.75 52.62,97.75 C1:R31.3 52.5,97.75 41.62,97.75 v41.25,97.38 | v67.25,83.88 63.25,87.88 52.62,87.88 C1:R13.3 52.5,87.88 41.62,87.88 v41.5,87.75 | v38.5,37.38 v43.25,37.38 | v33.25,57.88 33.38,57.75 36.38,57.75 | 36.38,57.75 v38.5,57.75 v41.25,57.75 52.38,57.75 52.5,57.88 C3:R31.3 52.62,58 v57.62,58 66.25,58 66.5,58.25 | 36.38,57.75 v36.38,61.25 | 66.5,58.25 v68.12,59.88 | 66.5,58.25 v69.38,55.38 71.75,55.38 v71.75,42.38
  Bottom 0.152: 38,5.25 38,9.25 37,10.25 37,12.88 36.88,13 IC1.11 36.88,13.12 36.88,14.25 v37.62,15 | 38,5.25 39.12,4.12 39.5,4.12 IC6.4 | v39.75,15.25 39.75,21.25 39.38,21.62 D2.A | 12.38,26.12 11.62,26.12 C1:IC5.11 | 12.38,26.12 12.38,23.25 11.62,22.5 C1:C18.1 11.62,22.38 12.38,21.62 12.38,18.38 | 12.38,18.38 11.62,18.38 C2:IC5.11 | 12.38,18.38 12.38,15.5 11.62,14.75 C2:C18.1 11.62,14.62 12.38,13.88 12.38,10.88 | 12.38,3.38 11.62,3.38 C4:IC5.11 | 12.38,6.38 12.38,3.38 | 12.38,6.38 11.62,7.12 C3:C18.1 | 12.38,10.88 11.62,10.88 C3:IC5.11 | 12.38,6.38 12.38,10.88 | v9.5,3 9.5,1.25 9.38,1.12 C4:C18.1 | 12.38,3.38 v12.5,3.25 | v37.88,5.12 38,5.25 | 32.75,38.88 32.75,39.25 C4:R18.2 32.75,38.88 | 32.75,38.88 32.75,32.62 31.75,31.62 C4:R36.2 | 3.88,34.5 4.75,33.62 4.75,32 5.12,31.62 5.12,30.5 C4:C14.1 5.12,30.38 v5.12,28 | 3.88,34.5 3.62,34.75 C4:C15.1 3.88,34.5 | v12,36.38 11.38,36.38 C4:IC1.P$6 | 3.88,34.5 3.98,34.61 v2.71,35.88 | 32.75,38.88 31.75,38.88 31.75,38.75 v31,38 | 21.62,53.62 22.25,53.62 22.25,56.12 22.75,56.62 22.75,58.38 23,58.62 C3:R36.2 | 21.62,53.62 20.25,53.62 20,53.88 20,56.88 C3:C13.1 | v12,51.5 11.38,51.5 C3:IC1.P$6 | v9.5,50.62 9.5,60.38 10.12,61 10.12,63.38 11,63.38 12.12,64.5 12.12,66.38 10.5,66.38 10.25,66.62 10.25,68.38 11.25,69.38 C2:IC1.P$6 | v21.62,49.62 21.62,53.62 | v24.12,49.62 24.12,45.5 25.75,43.88 25.75,38.38 25.12,37.75 C4:R13.3 | v12.5,26.12 12.38,26.12 | 23.88,78.5 23.88,81.62 C2:C15.1 | 23.88,78.5 23.88,70.62 24.75,69.75 C2:R18.2 | v32.75,78.12 31.88,79 C1:R18.2 | v24.88,78.5 23.88,78.5 | v11.5,89.5 11.5,88.62 11.38,88.5 C1:IC1.P$6 | v20.38,89.25 21.12,88.5 C1:C13.1 21.25,88.5 23.62,90.88 23.62,96.5 25.38,98.25 C1:C17.1 25.5,98.38 25.5,99.62 37.62,99.62 39.88,97.38 C1:C14.1 40,97.38 v41.25,97.38
  Bottom 0.152: v67.25,93.5 68.5,93.5 C1:R36.2 | 41.25,87.5 41.25,84.75 40.25,84.75 C1:IC4.11 | 41.25,87.5 40,88.75 C1:C15.1 40,88.88 41.12,90 41.12,92.75 40.25,92.75 C1:IC2.11 | C1:IC3.P$6 59.5,88.38 59.5,87.5 57.62,85.62 C1:C16.1 57.5,85.62 53.25,85.62 | v67.25,83.88 67.25,82.75 68,82 C1:IC6.4 | 53.25,87.25 53.25,85.62 | 53.25,87.25 52.62,87.88 C1:R13.3 | v41.5,87.75 41.25,87.5 | 53.25,87.25 53.25,97.12 52.62,97.75 C1:R31.3 | 53.25,85.62 53.25,82.5 52.88,82.12 52.88,78.25 52.62,78 C2:R31.3 52.5,77.88 51.88,77.25 51.88,68.62 52.5,68 C2:R13.3 51.88,67.25 51.88,58.62 52.5,58 C3:R31.3 52.62,57.88 53.25,57.25 53.25,48.5 52.62,47.88 C3:R13.3 | 70.12,37.12 71.88,37.12 72.75,36.25 74,36.25 C2:C16.1 | 70.12,37.12 70.12,38.5 71.75,40.12 C4:IC6.4 71.75,40.25 v71.75,42.38 | 61.38,29.75 61.38,30.38 C4:R31.3 61.38,30.5 61.38,33.38 59.75,35 C4:IC3.P$6 | 61.38,29.75 61.38,29 58,29 C4:C16.1 | 70.12,37.12 70,37 70,31.62 68.12,29.75 61.38,29.75 | 40.5,60.25 41.25,59.5 v41.25,57.75 41.25,57 40.25,57 C3:IC2.11 | 40.5,60.25 39.62,60.25 C3:C14.1 | 41.25,73.75 41.62,73.75 41.62,77 41.25,77.38 C2:C14.1 | 41.25,73.75 40.25,73.75 C2:IC2.11 | 41.25,73.75 41.25,69.88 39.88,69.88 C2:C13.1 39.75,69.75 39.25,69.25 39.25,66.12 40.12,66.12 C2:IC4.11 40.25,66 40.62,66 41.25,65.38 41.25,61 40.5,60.25 | C4:IC4.11 40.25,37.38 v43.25,37.38 43.25,35.88 41.88,34.5 C4:C13.1 | 39.5,51.38 40.12,51.38 C3:IC4.11 | 39.5,49.62 39.5,48.12 39.62,48 C3:C15.1 39.75,47.88 42,45.62 | 39.5,49.62 39.5,51.38 | 42,45.62 42,46.25 C4:C17.1 | 42,45.62 42,45.25 41.25,44.5 41.25,43.25 40.25,43.25 C4:IC2.11 40.12,43.12 39.88,43.12 39.5,42.75 39.5,42.38 38.5,41.38 v38.5,37.38